# EAGLE board Sensor_Board_0x02_Temperature_Humidity_SHT31_v2 (EAGLE 8.5.1)
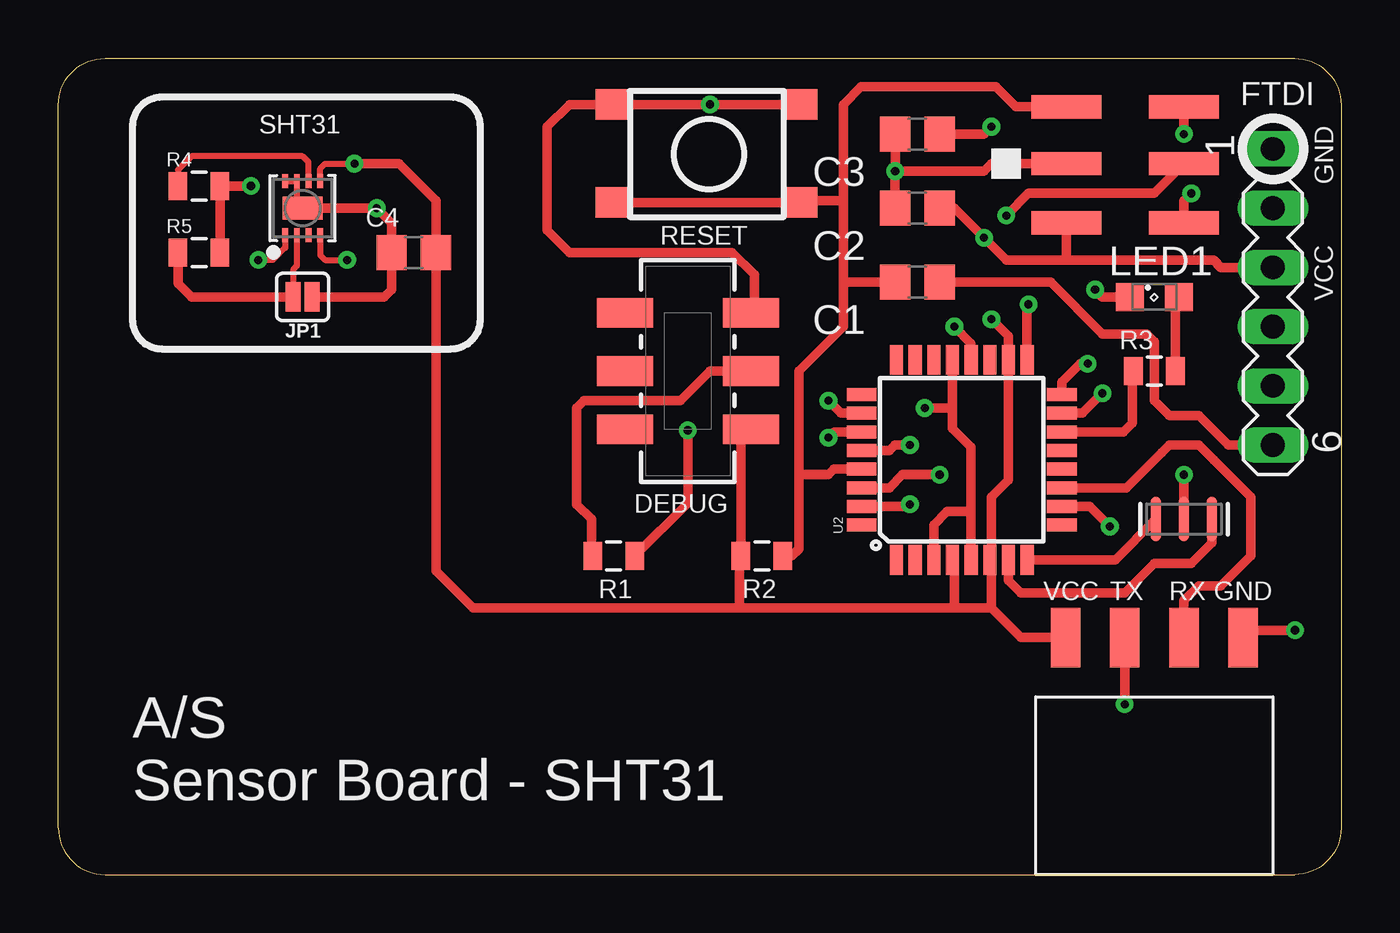
[diagram p0: board, top side]
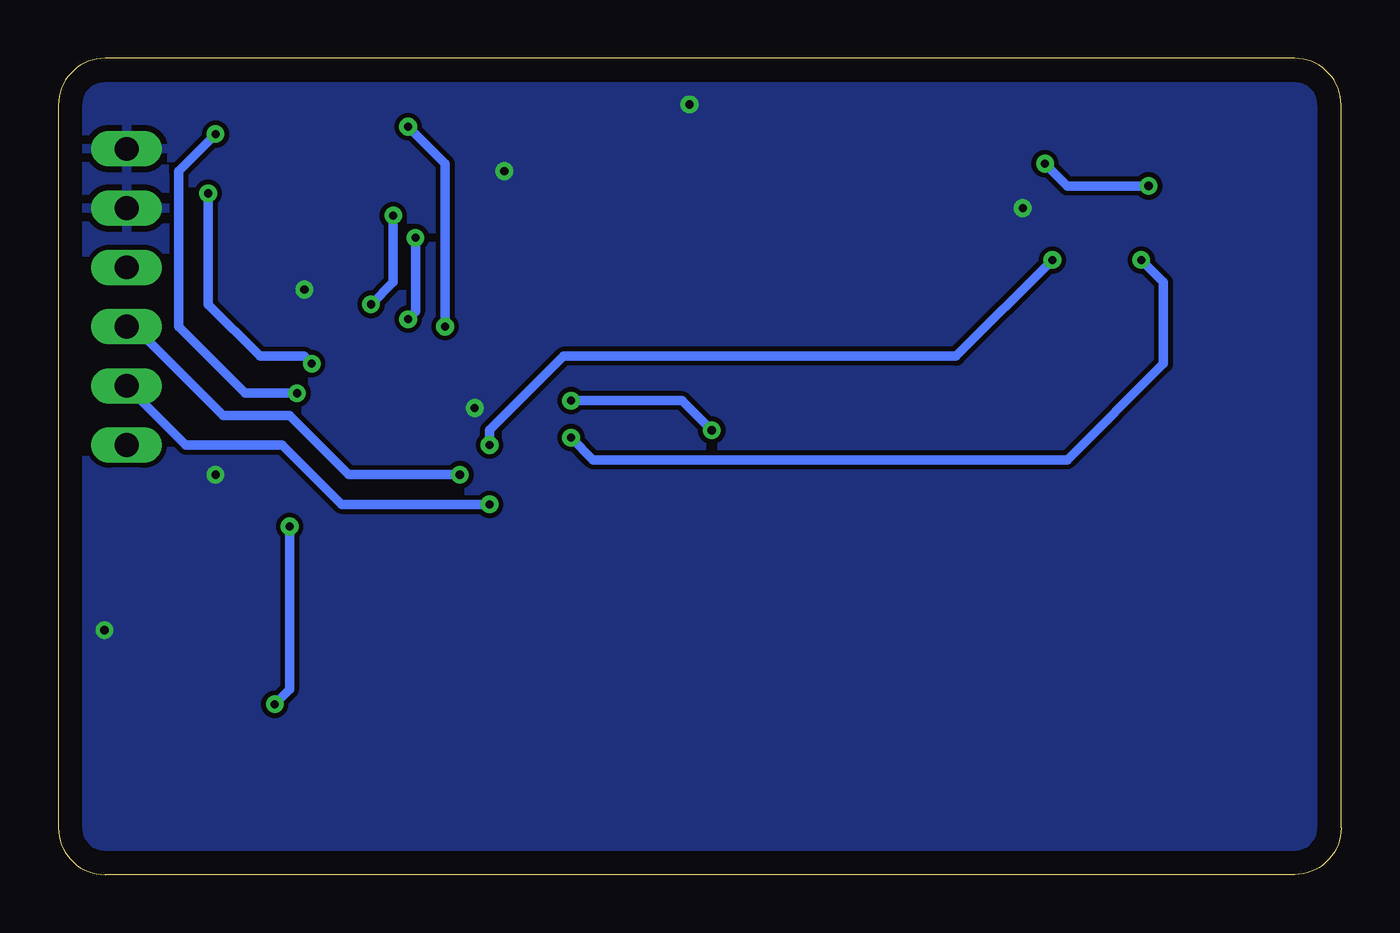
[diagram p1: board, bottom side, seen from below]

Size 55 x 35 mm. Coordinates in mm from the lower left corner, seen from the top.
Outline: 55,33 55,2 arc-90 53,0 2,0 arc-90 0,2 0,33 arc-90 2,35 53,35 arc-90 55,33
Copper layers (1*16): Top 0.035mm / dielectric 1.5mm / Bottom 0.035mm
Design rules "default *": minimum track width 14mil, minimum drill 24mil, track to track 8mil, track to pad 8mil, pad to pad 8mil, via to via 8mil, smd to smd 8mil, copper to edge 40mil, drill to drill 8mil, minimum pad ring 10mil, minimum via ring 8mil, stop-mask expansion 4mil, vias tented up to drill 0mil, thermal gap 10mil
Net classes: 0 default: width 0.3 mm; 1 Vsupply: width 0.5 mm; 5 GND: width 0.5 mm

## Footprints (pad centres in the part's own frame; a part is rotated, then mirrored left to right if it is on the bottom)
C0805 = smd 1.3 x 1.5: 1 -0.95,0; 2 0.95,0
M04_SMD_90 = smd 1.27 x 2.54: 1 0,0; 2 2.54,0; 3 5.08,0; 4 7.62,0
M-2X3 = smd 1 x 3: P$1 0,0; P$2 2.54,0; P$3 4.98,0; P$4 4.98,5.05; P$5 2.54,5.05; P$6 0,5.05
SPARKFUN-JUMPERS_SMT-JUMPER_2_NO_SILK = smd 0.635 x 1.27: 1 -0.406,0; 2 0.406,0
SML0805 = smd 1.2 x 1.2: A 1.05,0; C -1.05,0
0805 = smd 0.8 x 1.2: 1 -0.9,0; 2 0.9,0
M-PUSHBUTTON-SMD = smd 1.55 x 1.3: 1 0,0; 2 7.95,0; 3 0,-4.2; 4 7.95,-4.2
JS202011SCQN = smd 1.27 x 2.4: 1 -2.5,-2.7; 2 0,-2.7; 3 2.5,-2.7; 4 -2.5,2.7; 5 0,2.7; 6 2.5,2.7
MA06-1 = drill 1.016 long: 1 -6.35,0; 2 -3.81,0; 3 -1.27,0; 4 1.27,0; 5 3.81,0; 6 6.35,0
MICROBUILDER_SHT3X = smd 0.6 x 0.25: 1 -1.15,0.75; 2 -1.15,0.25; 3 -1.15,-0.25; 4 -1.15,-0.75; 5 1.15,-0.75; 6 1.15,-0.25; 7 1.15,0.25; 8 1.15,0.75 | smd 1 x 1.7: THERMAL 0,0
TQFP32-08 = smd 1.27 x 0.559: 1 -4.293,2.8; 2 -4.293,2; 3 -4.293,1.2; 4 -4.293,0.4; 5 -4.293,-0.4; 6 -4.293,-1.2; 7 -4.293,-2; 8 -4.293,-2.8; 17 4.293,-2.8; 18 4.293,-2; 19 4.293,-1.2; 20 4.293,-0.4; 21 4.293,0.4; 22 4.293,1.2; 23 4.293,2; 24 4.293,2.8 | smd 0.559 x 1.27: 9 -2.8,-4.293; 10 -2,-4.293; 11 -1.2,-4.293; 12 -0.4,-4.293; 13 0.4,-4.293; 14 1.2,-4.293; 15 2,-4.293; 16 2.8,-4.293; 25 2.8,4.293; 26 2,4.293; 27 1.2,4.293; 28 0.4,4.293; 29 -0.4,4.293; 30 -1.2,4.293; 31 -2,4.293; 32 -2.8,4.293
RESONATOR-SMD = smd 0.45 x 1.905: 1 -1.2,0; 2 0,0; 3 1.2,0

## Placement (x,y rotation side)
C1  100n  [C0805]  36.83,25.4 180 top
C2  100n  [C0805]  36.83,28.57 180 top
C3  100n  [C0805]  36.83,31.75 180 top
C4  100n  [C0805]  15.24,26.67 180 top
J1  M04_SMD_90  [M04_SMD_90]  43.18,10.16 0 top
J4  ARDUINO_ISP  [M-2X3]  48.26,27.94 90 top
JP1  [SPARKFUN-JUMPERS_SMT-JUMPER_2_NO_SILK]  10.48,24.77 180 top
LED1  Red  [SML0805]  46.99,24.77 0 top
R1  10k  [0805]  23.81,13.65 0 top
R2  10k  [0805]  30.16,13.65 180 top
R3  330  [0805]  46.99,21.59 180 top
R4  10k  [0805]  6.03,29.53 0 top
R5  100k  [0805]  6.03,26.67 0 top
S1  Reset  [M-PUSHBUTTON-SMD]  23.81,33.02 0 top
S3  JS202011SCQN  [JS202011SCQN]  26.99,21.59 90 top
SV1  [MA06-1]  52.07,24.77 270 top
U1  [MICROBUILDER_SHT3X]  10.48,28.57 90 top
U2  ATMEGA328P_TQFP  [TQFP32-08]  38.73,17.78 90 top
Y1  8MHZ  [RESONATOR-SMD]  48.26,15.24 180 top

## Library data of the parts
C1-C4 = eagle-ltspice; SPICEMODEL: NONE; SPICEPREFIX: C
J1 S3 = myownthings
J4 S1 = marc_library
JP1 = SparkFun_CSS811_Breakout
LED1 = led
R1-R5 = SparkFun-Passives
SV1 = con-lstb; OC_FARNELL: unknown; OC_NEWARK: unknown
U1 = Adafruit SHT31 Breakout
U2 = marc_library; PROD_ID: IC-09069
Y1 = marc_library; PROD_ID: XTAL-08895

## Nets
DBG_ENABLE: R1.2 U2.26
FTDI_RESET: C1.1 SV1.6
FTDI_RXI: SV1.4 U2.30
FTDI_TXO: SV1.5 U2.31
GND [GND]: C2.2 C3.2 C4.2 J1.4 J4.P$5 JP1.1 LED1.C S1.1 S1.2 S3.3 SV1.1 SV1.2 U1.7 U1.8 U1.THERMAL U2.3 U2.5 U2.21 Y1.2
L1: R3.2 U2.14
MCU_RXI: J1.3 U2.11
MCU_TXO: J1.2 U2.10
MISO: J4.P$1 U2.16
MOSI: J4.P$3 U2.15
N$1: U2.8 Y1.3
N$2: U2.7 Y1.1
N$3: R1.1 S3.2
N$4: R4.1 U1.6
N$5: JP1.2 R5.1 U1.2
N$15: C3.1 U2.20
N$30: LED1.A R3.1
RESET: C1.2 J4.P$4 R2.1 S1.3 S1.4 U2.29
SCK: J4.P$2 U2.17
SCL: U1.4 U2.28
SDA: U1.1 U2.27
VCC [Vsupply]: C2.1 C4.1 J1.1 J4.P$6 R2.2 R4.2 R5.2 S3.1 SV1.3 U1.5 U2.4 U2.6 U2.18

## Tracks (layer width: path | path; a pad name or v marks a point on that pad's centre or on a via)
DBG_ENABLE  (via drill 0.35)
  Top 0.406: R1.2 26.99,15.93 v26.99,19.05 | U2.26 33.56,19.78 v33.02,20.32
  Bottom 0.406: v26.99,19.05 28.26,20.32 v33.02,20.32
FTDI_RESET
  Top 0.406: C1.1 42.55,25.4 44.77,23.18 46.67,23.18 46.99,22.86 46.99,20.32 47.62,19.68 48.9,19.68 50.16,18.41 SV1.6
FTDI_RXI  (via drill 0.35)
  Top 0.406: U2.30 35.63,16.58 36.2,17.14 v37.78,17.14
  Bottom 0.406: SV1.4 51.75,23.5 47.94,19.68 45.09,19.68 42.55,17.14 v37.78,17.14
FTDI_TXO  (via drill 0.35)
  Top 0.406: U2.31 36.42,15.78 v36.51,15.88
  Bottom 0.406: SV1.5 49.53,18.41 45.4,18.41 42.86,15.88 v36.51,15.88
GND  (via drill 0.35)
  Top 0.254: U1.THERMAL 10.23,28.82 U1.7 U1.8
  Top 0.406: S1.2 v27.94,33.02 S1.1 21.91,33.02 20.95,32.07 20.95,27.62 21.91,26.67 28.89,26.67 29.84,25.72 29.84,24.25 S3.3 | 38.34,20 38.34,19.13 39.13,18.33 39.13,15.56 | 38.34,20 U2.21 | 39.13,15.56 U2.5 | U2.3 37.53,14.99 38.1,15.56 39.13,15.56 | v53.02,10.48 51.12,10.48 J1.4 | v48.26,17.14 Y1.2 | v37.15,20 38.34,20 | v44.45,25.08 44.77,24.77 LED1.C | J4.P$5 40.01,30.48 39.69,30.16 v35.88,30.16 | C3.2 v35.88,30.16 | v35.88,30.16 C2.2 | JP1.1 13.97,24.77 14.29,25.09 C4.2 14.29,27.94 v13.65,28.57 U1.THERMAL
  pour Bottom: 55,33 55,2 arc-90 53,0 2,0 arc-90 0,2 0,33 arc-90 2,35 53,35 arc-90
L1
  Top 0.406: U2.14 45.65,18.98 46.04,19.37 46.04,21.54 R3.2
MCU_RXI
  Top 0.406: U2.11 45.79,16.58 47.31,18.1 47.62,18.41 48.9,18.41 49.53,17.78 51.12,16.19 51.12,13.65 49.85,12.38 48.9,12.38 48.26,11.75 J1.3
MCU_TXO  (via drill 0.35)
  Top 0.406: U2.10 44.23,15.78 v45.09,14.92 | v45.72,7.3 J1.2
  Bottom 0.406: v45.09,14.92 45.09,7.94 v45.72,7.3
MISO  (via drill 0.35)
  Top 0.406: J4.P$1 48.26,28.89 v48.58,29.21 | U2.16 43.03,21.12 43.81,21.91 v44.13,21.91
  Bottom 0.406: v48.58,29.21 48.58,24.45 46.35,22.23 44.45,22.23 v44.13,21.91
MOSI  (via drill 0.35)
  Top 0.406: J4.P$3 v48.26,31.75 | v44.77,20.64 43.91,19.78 U2.15
  Bottom 0.406: v48.26,31.75 49.85,30.16 49.85,23.5 46.99,20.64 v44.77,20.64
N$1
  Top 0.406: Y1.3 45.31,13.49 U2.8
N$2
  Top 0.406: Y1.1 49.46,14.22 48.58,13.34 46.99,13.34 45.72,12.06 41.27,12.06 40.73,12.61 U2.7
N$3
  Top 0.406: S3.2 27.94,21.59 26.67,20.32 22.54,20.32 22.23,20 22.23,15.88 22.86,15.24 22.86,13.71 R1.1
N$4
  Top 0.254: U1.6 10.73,30.55 10.48,30.8 5.71,30.8 5.13,30.21 R4.1
N$5
  Top 0.254: U1.2 10.23,26.1 10.07,25.95 JP1.2
  Top 0.406: R5.1 5.13,25.35 5.71,24.77 JP1.2
N$15  (via drill 0.35)
  Top 0.406: C3.1 39.69,31.75 v40.01,32.07 | v38.42,23.5 39.13,22.78 U2.20
  Bottom 0.406: v38.42,23.5 38.42,30.48 v40.01,32.07
N$30
  Top 0.406: R3.1 47.89,24.61 LED1.A
RESET
  Top 0.406: J4.P$4 41.06,32.92 40.2,33.78 34.42,33.78 33.66,33.02 33.66,28.89 | 33.66,28.89 33.66,25.4 | 33.66,25.4 33.66,23.5 31.75,21.59 31.75,17.14 | R2.1 31.43,13.65 31.75,13.97 31.75,17.14 | C1.2 33.66,25.4 | S1.3 S1.4 31.84,28.89 33.66,28.89 | U2.29 33.26,17.38 33.02,17.14 31.75,17.14
SCK  (via drill 0.35)
  Top 0.406: J4.P$2 46.99,29.21 41.59,29.21 v40.64,28.26 | U2.17 41.53,24.39 v41.59,24.45
  Bottom 0.406: v40.64,28.26 40.64,25.4 v41.59,24.45
SCL  (via drill 0.35)
  Top 0.254: U1.4 11.23,26.55 11.43,26.35 v12.38,26.35
  Top 0.406: U2.28 35.64,18.18 35.88,18.41 v36.51,18.41
  Bottom 0.406: v12.38,26.35 16.51,22.23 33.34,22.23 36.51,19.05 v36.51,18.41
SDA  (via drill 0.35)
  Top 0.254: U1.1 9.73,26.87 9.21,26.35 v8.57,26.35
  Top 0.406: v33.02,18.73 33.27,18.98 U2.27
  Bottom 0.406: v8.57,26.35 7.62,25.4 7.62,21.91 11.75,17.78 32.07,17.78 v33.02,18.73
VCC  (via drill 0.35)
  Top 0.254: U1.5 11.23,30.28 11.43,30.48 v12.7,30.48
  Top 0.406: C2.1 38.42,28.57 v39.69,27.3 40.64,26.35 43.18,26.35 | 43.18,26.35 49.53,26.35 49.85,26.04 SV1.3 | J4.P$6 43.21,26.38 43.18,26.35 | S3.1 29.26,18.66 R2.2 29.21,13.6 29.21,11.43 | J1.1 41.27,10.16 40.01,11.43 | 38.42,11.43 40.01,11.43 | 29.21,11.43 38.42,11.43 | 40.01,11.43 40.01,13.42 U2.6 40.01,13.56 40.01,16.19 40.73,16.92 U2.18 40.73,23.08 v40.01,23.81 | U2.4 38.42,13.4 38.42,11.43 | R5.2 R4.2 v8.26,29.53 | C4.1 16.19,23.81 16.19,13.02 17.78,11.43 29.21,11.43 | C4.1 | C4.1 16.19,28.89 14.61,30.48 v12.7,30.48
  Bottom 0.406: v39.69,27.3 39.69,24.13 v40.01,23.81 | v8.26,29.53 11.75,29.53 v12.7,30.48

## Text on the board
tPlace: SHT31 | FTDI | GND | RESET | VCC | DEBUG | VCC | TX | RX | GND | A/S / Sensor Board - SHT31